# Altium PCB SENSEI_Base-Board.PcbDoc (part 8 of 10)
Units mm, origin at the board's own origin, x right, y up, seen from the top; angles counter-clockwise.
Board outline 51.6 x 28.1 mm, 8 copper layers (Top Sig/Pwr, GND1, Sig1, GND2, Sig2, Pwr, GND3, Bot Sig/Pwr), stack 1.53 mm thick; 209 components, 201 nets, 1031 pads, 2222 vias.
Unrouted connection lines stored in the file: 214.
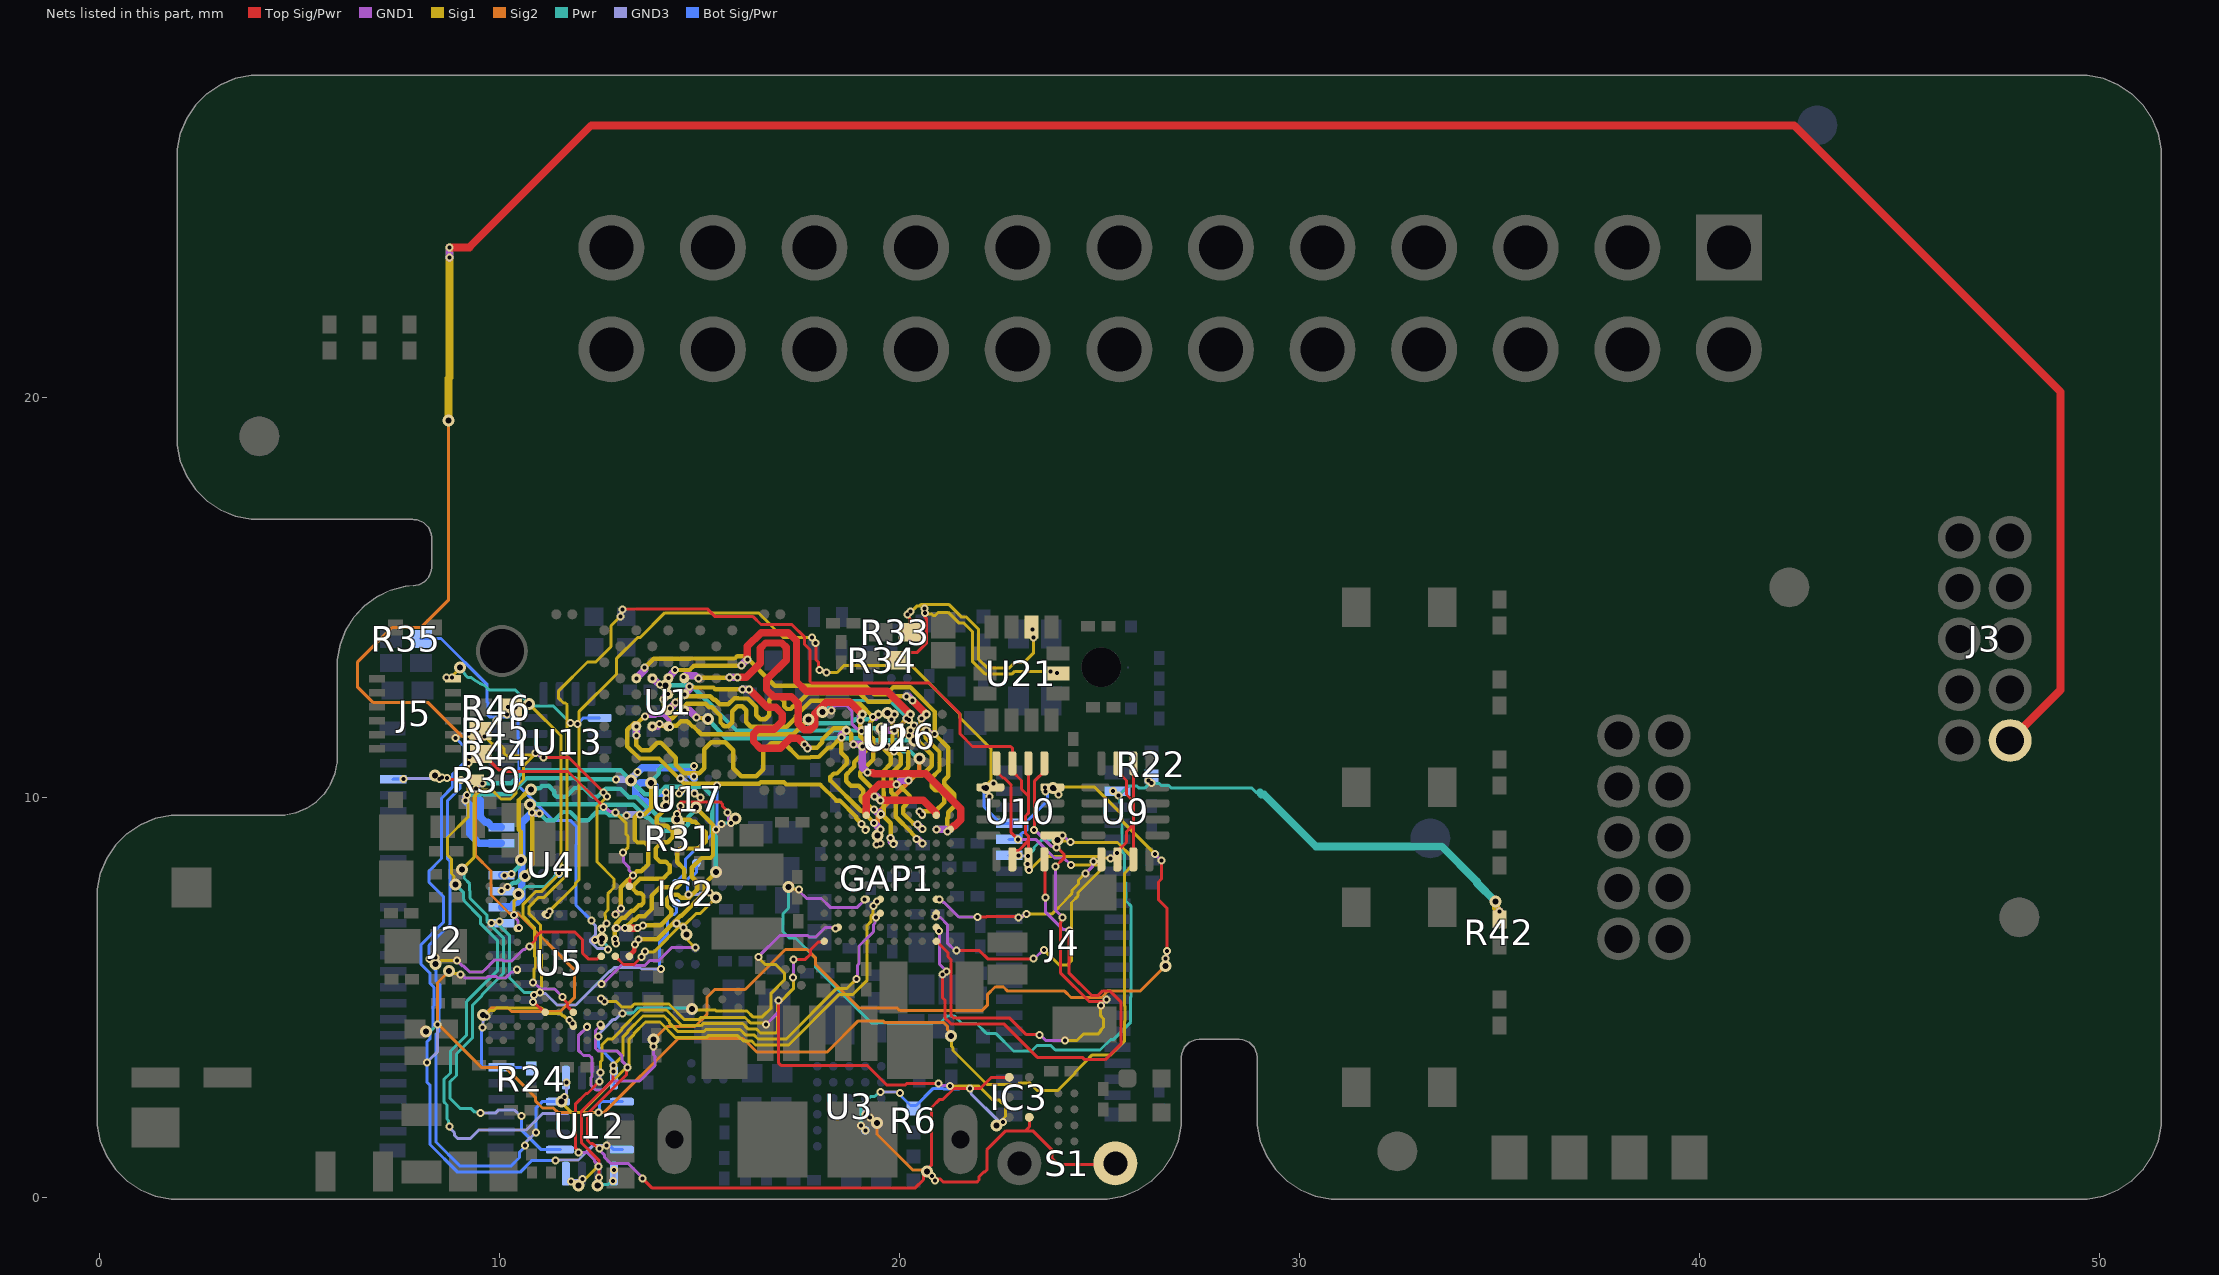
[diagram p13: the nets of this part, all layers, seen from the top]

## Via types
v1: diameter 0.2, hole 0.1, Top Sig/Pwr to GND1, 544 vias
v2: diameter 0.2, hole 0.1, GND3 to Bot Sig/Pwr, 436 vias
v3: diameter 0.2, hole 0.1, GND1 to Sig1, 385 vias
v4: diameter 0.3, hole 0.15, Sig1 to Pwr, 293 vias
v5: diameter 0.3, hole 0.15, Top Sig/Pwr to Bot Sig/Pwr, tented both sides, 284 vias
v6: diameter 0.2, hole 0.1, Pwr to GND3, 280 vias

## Nets (pads, with @x,y where several pads share a name; then routed paths per layer and width w, separated by ;. In a path a pad name is that pad's centre, name@x,y a point inside that pad or via, vN(x,y) a via of type N, cw(c..) or ccw(c..) an arc to the next point about the centre after c; other vN are vias at no path point) (continued)
nRF_P1.00_GAP_GPIO60_GAP: GAP1.J4 U9.5 | length 5
  Top Sig/Pwr w0.075: v1(21.956,7.012) 22.181,7.012 22.183,7.014 22.961,7.014 v1(22.975,7) ; v1(24.85,8.399) 25.024,8.399 U9.5@25.05,8.425
  GND1 w0.075: v1(21.008,7.442) 21.028,7.442 21.105,7.365 21.13,7.365 21.489,7.007 21.951,7.007 v1(21.956,7.012) ; v1(22.975,7) 22.999,7.024 23.088,7.024 23.151,7.087 v3(23.184,7.087) ; v3(24.65,8.099) 24.662,8.099 24.826,8.263 24.826,8.375 v1(24.85,8.399)
  Sig1 w0.075: v3(23.184,7.087) 23.822,7.087 24.153,7.418 24.153,7.433 24.322,7.602 24.322,7.682 24.486,7.846 24.486,7.934 v3(24.65,8.099)
nRF_P1.01_GAP_GPIO61: J4.6 U5.E10 U10.1 | length 22.6
  Top Sig/Pwr w0.075: U5.E10@11.15,7.075 11.172,7.053 v1(11.204,7.053) ; v1(17.903,13.853) 17.919,13.838 17.919,13.438 17.977,13.381 17.977,13.212 v1(18,13.188) ; v1(22.1,10.25) U10.1@22.275,10.25
  GND1 w0.075: v1@11.204,7.103 v1(11.204,7.053) 11.26,7.109 v3(11.26,7.14) ; v3(17.819,13.998) 17.819,13.968 17.903,13.883 v1(17.903,13.853) ; v1(18,13.188) 18.024,13.164 18.109,13.164 18.151,13.123 v3(18.184,13.123) ; v1(22.1,10.25) 22.1,10.216 22.226,10.09 22.226,10.049 v3(22.25,10.025)
  GND3 w0.075: v2(22.125,10.225) 22.159,10.225 22.2,10.266 22.249,10.266 22.324,10.341 v6(22.358,10.341)
  Sig1 w0.075: v3(11.26,7.14) 11.26,7.161 11.91,7.81 11.91,7.859 11.996,7.946 11.996,12.148 12.934,13.085 12.934,13.473 13.452,13.992 13.519,13.992 14.139,14.612 16.48,14.612 17.095,13.998 v3(17.819,13.998) ; v3(18.184,13.123) 18.448,13.123 18.624,13.298 19.442,13.298 19.66,13.298 ; 19.661,13.298 20.298,13.298 21.523,12.073 21.523,11.983 22.298,11.209 22.298,10.425 22.158,10.285 v4@22.158,10.233 ; v4(22.167,10.233) 22.167,10.172 22.226,10.113 22.226,10.049 v3(22.25,10.025)
  Pwr w0.075: v4(22.167,10.233) 22.216,10.233 22.324,10.341 v6(22.358,10.341)
  Bot Sig/Pwr w0.075: v2@22.164,10.185 22.12,10.142 22.12,9.764 22.389,9.495 22.389,9.491 22.53,9.35 J4.6@22.745,9.35
nRF_P1.01_GAP_GPIO61_GAP: GAP1.J3 U10.16 | length 11.3
  Top Sig/Pwr w0.075: v1(21.425,6.171) 22,6.171 22.209,5.962 23.354,5.962 v1(23.359,5.967) ; U10.16@22.436,10.639 22.594,10.481 22.624,10.481 22.797,10.308 22.797,9.117 v1(22.963,8.951)
  GND1 w0.075: v1(20.909,7.017) 20.943,7.017 20.967,6.993 21.029,6.993 21.202,6.82 21.202,6.361 21.392,6.171 v1(21.425,6.171) ; v1(22.963,8.951) 23.411,8.951 23.878,8.484 24.113,8.484 v3(24.29,8.306) ; v1(23.359,5.967) 23.382,5.967 23.592,6.177 v3(23.615,6.177)
  Sig1 w0.075: v3(23.615,6.177) 23.627,6.177 23.991,5.812 24.209,5.812 24.303,5.907 24.303,7.371 24.472,7.54 24.472,7.62 25.042,8.19 25.042,8.252 24.983,8.311 24.295,8.311 v3(24.29,8.306)
nRF_P1.09_GAP_GPIO62: J4.8 U5.H2 U10.12 | length 29.2
  Top Sig/Pwr w0.075: v1(12.196,4.258) 12.196,4.271 U5.H2@12.2,4.275 ; v1(23.65,10.151) 23.75,10.25 U10.12@23.825,10.25 ; v1(26.55,8.421) 26.55,7.956 26.479,7.885 26.479,7.438 26.698,7.218 v1(26.698,6.163)
  GND1 w0.075: v1(12.196,4.258) 11.975,4.037 11.975,3.674 12.105,3.544 12.256,3.544 12.312,3.488 12.312,3.007 12.288,2.983 12.288,2.807 12.413,2.682 12.589,2.682 12.814,2.908 13.511,2.908 13.892,3.289 13.892,3.525 13.857,3.56 v3(13.857,3.775) ; v1(23.65,10.151) 23.866,10.151 23.941,10.075 v3(23.975,10.075) ; v3(26.387,8.578) 26.39,8.578 26.547,8.421 v1(26.55,8.421) ; v3(26.661,5.972) 26.698,6.009 v1(26.698,6.163)
  Sig2 w0.075: v4(13.86,3.945) 14.188,4.273 14.894,4.273 15.187,4.566 15.187,4.993 15.386,5.192 16.148,5.192 17.152,6.196 17.697,6.196 17.901,5.992 17.901,5.824 18.998,4.728 19.949,4.728 20.012,4.665 20.511,4.665 ; 20.512,4.665 21.658,4.665 ; 21.665,4.665 22.065,4.665 22.2,4.8 22.2,5.067 22.39,5.257 22.608,5.257 22.711,5.154 24.135,5.154 24.292,4.998 25.053,4.998 25.218,5.162 26.032,5.162 v4(26.65,5.78)
  GND3 w0.075: v2(23.647,10.243) 23.665,10.225 23.868,10.225 v6(23.886,10.207)
  Sig1 w0.075: v3(13.857,3.775) 13.859,3.777 13.859,3.943 v4(13.86,3.945) ; v3(23.975,10.075) 23.975,10.087 23.847,10.216 v4(23.847,10.228) 23.873,10.254 24.884,10.254 25.572,9.565 25.572,9.403 26.387,8.588 v3(26.387,8.578) ; v4(26.65,5.78) 26.65,5.961 v3(26.661,5.972)
  Pwr w0.075: v4(23.847,10.228) 23.868,10.207 v6(23.886,10.207)
  Bot Sig/Pwr w0.075: J4.8@22.745,8.95 22.96,8.95 23.038,9.028 23.038,9.079 23.081,9.122 23.122,9.122 23.188,9.188 23.188,9.393 23.706,9.911 23.706,10.15 23.662,10.193 v2@23.662,10.254
nRF_P1.09_GAP_GPIO62_GAP: GAP1.J1 U10.13 | length 14.6
  Top Sig/Pwr w0.075: GAP1.J1@20.925,6.4 20.932,6.4 21.217,6.115 21.217,6.016 21.287,5.946 21.287,4.553 21.353,4.487 22.751,4.487 23.164,4.074 23.488,4.074 v1(23.5,4.062) ; v1(23.368,9.188) 23.375,9.195 23.375,10.4 23.64,10.665 U10.13@23.64,10.684 ; U10.13@23.625,10.85 23.625,10.699 U10.13@23.64,10.684 ; U10.13@23.64,10.756 U10.13@23.64,10.684 ; U10.13@23.687,10.637 U10.13@23.64,10.684 ; v1(23.908,8.271) 24.112,8.475 24.112,8.583 23.945,8.75 v1(23.925,8.75) ; v1(24.086,7) 24.086,6.966 24.047,6.927 24.047,6.88 24.027,6.859 24.027,5.614 24.74,4.9 25.091,4.9 25.141,4.95 v1(25.175,4.95)
  GND1 w0.075: v1(23.368,9.188) 23.386,9.188 23.8,8.774 23.901,8.774 v1(23.925,8.75) ; v1(23.5,4.062) 23.517,4.062 23.659,3.92 v3(24.142,3.919) ; v1@23.908,8.252 v1(23.908,8.271) ; v1@23.932,8.257 23.908,8.233 23.908,7.178 v1(24.086,7) ; v3(25.049,4.8) 25.049,4.812 25.175,4.938 v1(25.175,4.95)
  Sig1 w0.075: v3(24.142,3.919) 24.44,3.919 24.609,4.088 24.974,4.088 25.025,4.139 25.025,4.166 25.107,4.248 25.107,4.466 25.025,4.548 25.025,4.61 25.026,4.611 25.026,4.777 v3(25.049,4.8)
nRF_P1.11_GAP_GPIO63: J4.10 U5.C6 U10.9 | length 32.8
  Top Sig/Pwr w0.075: v1(10.446,5.698) 10.446,5.679 U5.C6@10.45,5.675 ; U10.9@23.974,9.08 24.045,9.08 v1(24.075,9.05)
  GND1 w0.075: v3(9.024,5.565) 9.058,5.565 9.137,5.486 9.68,5.486 9.713,5.519 9.925,5.519 9.959,5.486 10.161,5.486 10.305,5.63 10.365,5.63 10.434,5.698 v1(10.446,5.698) ; v1(24.075,9.05) 24.095,9.05 24.264,8.881 v3(24.283,8.881)
  Sig2 w0.075: v4(8.748,5.656) 8.461,5.368 8.461,4.339 9.55,3.25 10.15,3.25 10.9,2.5 10.9,2.415 11.082,2.233 11.351,2.233 11.458,2.125 12.624,2.125 14.471,3.973 16.096,3.973 16.431,3.638 18.203,3.638 18.976,4.411 19.588,4.411 19.634,4.365 20.145,4.365 21.115,4.365 21.21,4.269 21.21,4.181 21.295,4.097 v4(21.295,4.036)
  GND3 w0.075: v2(22.978,8.542) 22.984,8.537 23.218,8.537 v6(23.223,8.532)
  Sig1 w0.075: v4(8.748,5.656) 8.809,5.656 8.876,5.589 9,5.589 v3(9.024,5.565) ; v4(21.295,4.036) 21.307,4.023 21.307,3.773 21.345,3.736 21.345,3.67 22.193,2.822 22.972,2.822 23.014,2.863 23.252,2.863 23.44,2.675 23.966,2.675 24.397,3.105 24.397,3.133 24.671,3.407 24.671,3.408 24.826,3.563 25.288,3.563 25.625,3.9 25.625,4.398 25.638,4.41 25.638,4.784 25.636,4.785 25.636,8.11 25.825,8.298 25.825,8.501 25.454,8.872 24.292,8.872 v3(24.283,8.881) ; v4(23.951,8.936) 23.982,8.905 24.252,8.905 v3@24.28,8.878
  Pwr w0.075: v6(23.223,8.532) 23.223,8.547 23.366,8.69 23.366,8.743 23.56,8.936 v4(23.951,8.936)
  Bot Sig/Pwr w0.075: J4.10@22.745,8.55 22.971,8.55 v2(22.978,8.542)
nRF_P1.11_GAP_GPIO63_GAP: GAP1.J2 U10.8 | length 13.5
  Top Sig/Pwr w0.075: v1(21.075,5.572) 21.075,4.993 21.137,4.931 21.137,4.491 21.291,4.337 22.613,4.337 23.45,3.5 24.576,3.5 24.637,3.439 25.148,3.439 25.538,3.828 25.538,4.888 25.263,5.163 25.087,5.163 24.975,5.05 24.802,5.05 24.239,5.614 24.239,6.664 v1(24.25,6.675) ; U10.8@23.625,8.45 23.637,8.437 23.637,7.504 v1(23.65,7.491)
  Top Sig/Pwr w0.15: GAP1.J2@20.98,6.683 20.98,6.686 GAP1.J2@20.925,6.741 ; v1(20.989,6.66) 20.989,6.673 20.976,6.686 20.976,6.689 GAP1.J2@20.925,6.741 ; GAP1.J2@20.925,6.741 GAP1.J2@20.925,6.75 GAP1.J2@20.925,6.741
  GND1 w0.075: v1(20.989,6.66) 21.005,6.645 21.005,5.829 21.18,5.654 v3(21.18,5.64) ; v1(21.075,5.572) 21.075,5.577 v3@21.152,5.654 ; v1(23.65,7.491) 23.65,7.136 24.087,6.699 24.226,6.699 v1(24.25,6.675)
nRF_QSPI_CLK: J2.20 U5.L7 U17.B3 | length 13.5
  Top Sig/Pwr w0.111: U5.L7@13.25,6.025 13.25,6.046 13.371,6.167 13.371,6.308 v1@13.378,6.316
  GND1 w0.111: v1(13.388,6.319) 13.388,6.341 13.475,6.428 v3(13.475,6.45)
  GND3 w0.111: v2(9.414,10.218) 9.428,10.218 9.561,10.35 v6(9.575,10.35) ; v2(14.498,10.094) 14.498,10.106 v6@14.571,10.179 ; v2@14.519,10.127 v6@14.571,10.179 ; v6@14.571,10.179 v6(14.571,10.191) v6@14.571,10.179
  Sig1 w0.111: v3(13.475,6.45) 13.945,6.45 14.533,7.037 14.554,7.037 15.139,7.622 15.139,7.846 15.419,8.126 v4(15.419,8.132)
  Pwr w0.111: v6(9.575,10.35) 10.298,10.35 10.625,10.677 13.032,10.677 v4(13.295,10.414) 13.636,10.073 13.957,10.073 14.153,10.268 14.598,10.268 v6@14.605,10.262 ; v6(14.571,10.191) 14.573,10.193 v6@14.573,10.268 ; v6@14.611,10.268 15.088,10.268 15.32,10.036 15.32,9.123 15.413,9.029 15.413,8.138 v4(15.419,8.132)
  Bot Sig/Pwr w0.185: v2(9.414,10.218) 9.417,10.215 9.417,10.032 9.521,9.928 9.521,9.507 9.656,9.373 9.712,9.373 9.817,9.268 10.037,9.268 J2.20@10.055,9.25 ; v2(14.498,10.094) 14.525,10.121 U17.B3@14.525,10.125
nRF_QSPI_CS: IC2.A1 U5.K7 | length 5
  Top Sig/Pwr w0.075: U5.K7@12.9,6.025 13.108,5.817 13.323,5.817 13.368,5.817 13.556,6.005 v1(13.556,6.011)
  GND1 w0.075: v1(13.556,6.011) 13.556,6.034 13.638,6.116 v3(13.638,6.139)
  GND3 w0.075: v2(14.725,7.575) 15.001,7.575 15.039,7.613 15.239,7.613 v6(15.251,7.625)
  Sig1 w0.075: v3(13.638,6.139) 13.649,6.127 13.86,6.127 14.569,6.836 14.662,6.836 14.917,7.091 15.02,7.091 v4(15.419,7.49)
  Pwr w0.075: v6(15.251,7.625) 15.267,7.625 15.403,7.49 v4(15.419,7.49)
  Bot Sig/Pwr w0.075: v2(14.725,7.575) 14.701,7.599 14.701,7.755 14.7,7.757 14.7,7.943 14.832,8.076 14.881,8.076 14.925,8.119 IC2.A1@14.925,8.35
nRF_QSPI_CS_CONN: IC2.C2 J2.14 | length 8.1
  GND3 w0.075: v2(9.801,6.857) 9.818,6.873 9.983,6.873 v6(10,6.89) ; v6(11.017,5.12) 11.041,5.096 11.156,5.096 11.446,4.806 11.91,4.806 12.743,5.639 12.764,5.639 12.866,5.741 13.52,5.741 13.554,5.707 v2(14.045,5.707)
  Pwr w0.075: v6(10,6.89) 10.024,6.866 10.024,6.778 10.26,6.541 10.26,5.481 10.621,5.12 v6(11.017,5.12)
  Bot Sig/Pwr w0.075: v2(14.045,5.707) 14,5.751 14,6.369 14.2,6.568 14.2,6.943 14.332,7.076 14.381,7.076 14.425,7.119 IC2.C2@14.425,7.35
nRF_QSPI_CS_RAM: IC2.B2 R31.1 U17.A3 | length 7
  Top Sig/Pwr w0.075: R31.1@14.5,9.234 14.5,9.844 14.544,9.887 15.523,9.887 15.576,9.834 15.576,9.783 15.7,9.659 v1(15.7,9.625)
  GND1 w0.075: v1(15.7,9.625) 15.724,9.601 15.724,9.45 15.786,9.387 v3(15.786,9.353)
  GND3 w0.075: v2(14.528,10.465) 14.552,10.441 14.65,10.441 14.785,10.306 15.034,10.306 15.044,10.297 v2(15.445,10.297) ; v2(15.421,9.194) 15.421,9.198 15.55,9.328 v6(15.55,9.331)
  Sig1 w0.075: v3(15.786,9.353) 15.79,9.353 15.904,9.467 v4(15.907,9.467)
  Pwr w0.075: v6(15.55,9.331) 15.574,9.355 15.735,9.355 15.847,9.467 v4(15.907,9.467)
  Bot Sig/Pwr w0.075: IC2.B2@14.425,7.85 14.425,7.881 14.651,8.107 14.651,8.445 14.903,8.698 14.939,8.698 v2@15.445,9.204 ; U17.A3@14.525,10.475 14.528,10.472 v2(14.528,10.465) ; v2(15.421,9.194) 15.431,9.204 v2@15.445,9.204 ; v2(15.445,10.297) v2@15.445,9.204
nRF_QSPI_CS_SEL: IC2.D2 U5.J5 | length 3.6
  Top Sig/Pwr w0.075: U5.J5@12.55,5.325 v1(12.555,5.33)
  GND1 w0.075: v1(12.555,5.33) 12.583,5.33 13.071,5.817 13.358,5.817 13.377,5.799 13.644,5.799 13.764,5.919 13.987,5.919 14.308,6.24 v3(14.901,6.24)
  GND3 w0.075: v2(14.435,6.85) 14.469,6.85 14.548,6.771 14.587,6.771 v6(14.611,6.747)
  Sig1 w0.075: v4(14.677,6.573) 14.72,6.53 14.72,6.42 v3(14.901,6.24)
  Pwr w0.075: v6(14.611,6.747) 14.635,6.723 14.635,6.616 v4(14.677,6.573)
  Bot Sig/Pwr w0.075: IC2.D2@14.425,6.85 v2(14.435,6.85)
nRF_QSPI_IO0: J2.19 U5.K10 U17.A2 | length 13.9
  GND1 w0.111: v1(12.9,7.074) 12.9,7.079 13.04,7.219 v3(13.04,7.223)
  GND3 w0.111: v6(14.864,10.785) 14.868,10.781 14.868,10.524 v2(14.873,10.519)
  GND3 w0.185: v2(9.152,9.919) 9.155,9.922 9.155,10.017 9.191,10.053 v6(9.191,10.057) ; v6(12.914,10.446) 12.917,10.449 13.276,10.449 13.456,10.629 v2(13.46,10.629)
  Sig1 w0.111: v3(13.04,7.223) 13.04,7.748 13.441,8.149 13.549,8.149 13.721,8.322 13.721,8.786 13.638,8.87 13.455,8.87 13.39,8.934 13.39,9.093 13.384,9.1 13.384,9.505 13.455,9.576 13.63,9.576 13.798,9.744 v4(13.798,10.353)
  Pwr w0.111: v6(9.191,10.057) 9.492,10.057 9.512,10.077 10.288,10.077 10.682,10.471 11.892,10.471 11.917,10.446 v6(12.914,10.446) ; v4(13.798,10.353) 13.798,10.404 13.991,10.597 13.991,10.695 14.082,10.785 v6(14.864,10.785)
  Bot Sig/Pwr w0.185: v2(9.152,9.919) 9.152,9.915 9.262,9.805 9.262,9.081 9.417,8.925 9.493,8.85 J2.19@10.055,8.85 ; v2(13.46,10.629) 13.464,10.629 13.572,10.737 14.634,10.737 14.787,10.584 14.787,10.564 U17.A2@14.875,10.475 ; U17.A2@14.853,10.499 v2(14.873,10.519)
nRF_QSPI_IO1: J2.17 U5.K9 U17.C3 | length 12.5
  Top Sig/Pwr w0.185: U5.K9@12.9,6.725 12.906,6.731 v1(12.93,6.731)
  GND1 w0.111: v1@12.93,6.731 v3@13.138,6.731
  GND3 w0.111: v2(10.127,8.043) 10.144,8.06 10.252,8.06 10.28,8.088 v6(10.304,8.088) ; v6(14.443,9.577) 14.443,9.601 14.51,9.668 14.51,9.762 v2(14.527,9.78)
  Sig1 w0.111: v4(10.539,8.436) 10.539,9.142 10.49,9.191 10.49,9.933 10.687,10.129 10.736,10.129 v4(10.798,10.191) ; v3(13.138,6.73) 13.342,6.935 13.388,6.935 13.485,7.031 13.633,7.031 13.81,7.208 13.81,7.543 14.02,7.753 14.437,7.753 14.629,7.945 14.629,8.194 14.449,8.374 14.449,8.646 14.497,8.694 cw(c14.575,8.616) 14.578,8.727 14.844,8.72 ccw(c14.85,8.95) 14.868,8.72 14.955,8.727 ccw(c14.947,8.838) 15.025,8.759 15.157,8.891 15.157,9.123 14.895,9.386 14.817,9.386 14.763,9.44 v4(14.445,9.44)
  Pwr w0.111: v6(10.304,8.088) 10.503,8.287 10.503,8.4 v4(10.539,8.436) ; v4(10.798,10.191) 10.835,10.227 11.017,10.227 11.075,10.285 11.236,10.285 11.369,10.153 11.369,10.076 11.433,10.011 11.665,10.011 11.895,10.241 12.108,10.241 12.337,10.011 12.453,10.011 12.658,10.216 13.029,10.216 13.24,10.004 13.428,10.004 13.693,9.74 13.751,9.74 14.051,9.44 v4(14.445,9.44) ; v4(14.445,9.44) v6@14.444,9.577
  Bot Sig/Pwr w0.185: J2.17@10.055,8.05 10.12,8.05 v2(10.127,8.043)
nRF_QSPI_IO2: J2.16 U5.L9 U17.B2 | length 13.1
  Top Sig/Pwr w0.185: U5.L9@13.25,6.725 13.251,6.726 v1(13.456,6.727) v1(13.456,6.727)
  GND1 w0.111: v1(13.456,6.727) 13.48,6.727 13.536,6.784 13.581,6.784 v3(13.598,6.801)
  GND3 w0.111: v2(10.054,7.655) 10.078,7.655 10.159,7.736 10.187,7.736 v6(10.204,7.753) ; v2(14.881,10.094) 14.899,10.077 14.929,10.077 15.006,10 v6(15.03,10)
  Sig1 w0.111: v4(10.643,8.031) 10.643,8.082 10.767,8.206 10.767,8.267 10.819,8.32 10.819,9.717 10.771,9.766 v4(10.771,9.817) ; v3@13.604,6.801 14.034,6.801 14.294,7.061 14.294,7.185 14.193,7.287 14.193,7.463 14.296,7.567 14.467,7.567 14.544,7.49 14.744,7.49 14.953,7.699 14.953,7.877 14.815,8.016 14.815,8.237 15.06,8.483 15.28,8.483 15.343,8.545 15.343,9.314 v4(14.913,9.744)
  Pwr w0.111: v6(10.204,7.753) 10.229,7.753 10.334,7.858 10.359,7.858 10.367,7.866 10.428,7.866 10.592,8.031 v4(10.643,8.031) ; v4@10.758,9.825 12.555,9.825 12.561,9.819 13.351,9.819 13.681,9.489 13.739,9.489 14.069,9.159 14.552,9.159 14.573,9.18 14.582,9.18 14.725,9.323 14.725,9.505 14.913,9.693 v4(14.913,9.744) 14.913,9.795 15.013,9.895 15.013,9.983 v6(15.03,10)
  Bot Sig/Pwr w0.185: v2(10.054,7.655) 10.054,7.651 J2.16@10.055,7.65
nRF_QSPI_IO3: J2.15 U5.K8 U17.B4 | length 13.9
  GND1 w0.111: v1@12.901,6.377 12.903,6.379 v1@12.903,6.446 ; v1(12.915,6.349) 12.903,6.361 v1@12.903,6.446 ; v1@12.903,6.446 v3(12.892,6.458) v1@12.903,6.446
  GND3 w0.111: v2(14.172,10.123) 14.177,10.118 14.177,9.976 v6(14.182,9.971)
  GND3 w0.185: v2(10.815,9.618) 10.819,9.618 10.839,9.598 11.005,9.598 v6(11.008,9.595) ; v6(13.181,9.545) 13.185,9.545 13.211,9.57 13.509,9.57 v2(13.512,9.573)
  Sig1 w0.111: v3(12.892,6.458) 12.892,6.728 12.908,6.745 12.908,6.826 13.075,6.993 13.135,6.993 13.307,7.165 13.356,7.165 13.491,7.3 13.544,7.3 13.605,7.361 13.605,7.538 13.54,7.602 13.447,7.602 13.355,7.694 13.355,7.8 13.518,7.964 14.091,7.964 14.257,8.13 14.257,8.296 14.165,8.388 14.019,8.388 13.907,8.5 13.907,8.719 14.068,8.88 14.21,8.88 14.332,9.002 14.332,9.143 14.187,9.289 13.999,9.289 13.934,9.354 13.934,9.496 14.166,9.728 v4(14.166,9.779)
  Pwr w0.111: v6(11.008,9.595) 11.181,9.422 11.373,9.422 11.584,9.633 11.777,9.633 11.988,9.422 12.22,9.422 12.425,9.627 12.673,9.627 12.755,9.545 v6(13.181,9.545) ; v4@14.13,9.816 v4(14.166,9.779) 14.174,9.787 14.174,9.964 v6(14.182,9.971)
  Bot Sig/Pwr w0.185: J2.15@10.055,7.25 10.073,7.268 10.293,7.268 10.398,7.373 10.454,7.373 10.563,7.482 10.563,9.363 10.815,9.614 v2(10.815,9.618) ; v2(13.512,9.573) 13.515,9.576 13.635,9.576 13.72,9.661 13.72,9.861 13.7,9.88 ; 13.662,9.897 13.655,9.904 13.586,9.904 13.412,10.077 13.412,10.254 13.52,10.362 13.818,10.362 13.903,10.277 13.903,10.184 13.99,10.097 14.146,10.097 v2(14.172,10.123)
nRF_RAM_pwr_sel: U4.B2 U5.C9 | length 2.6
  Top Sig/Pwr w0.075: U5.C9@10.45,6.725 10.451,6.726 v1(10.493,6.726)
  GND1 w0.075: v3(10.362,7.053) 10.362,7.019 10.469,6.912 10.469,6.75 v1(10.493,6.726)
  GND3 w0.075: v2(11.487,8.103) 11.487,8.115 11.597,8.225 v6(11.597,8.236)
  Sig1 w0.075: v3(10.362,7.053) 10.362,7.404 10.483,7.525 v4(10.483,7.586)
  Pwr w0.075: v4(10.483,7.586) 10.49,7.586 10.672,7.769 11.13,7.769 v6(11.597,8.236)
OSPI_0: GAP1.J10 U1.H7 U2.D5 | length 11.8
  Top Sig/Pwr w0.185: v1(19.525,9.925) 20.597,9.925 20.925,9.597 GAP1.J10@20.925,9.55
  GND1 w0.185: v3(14.106,12.445) 14.109,12.448 14.109,12.468 14.219,12.578 v1(14.219,12.582) ; v3(19.342,12.008) 19.342,12.001 19.397,12.001 19.471,12.075 v1(19.475,12.075) ; v3(19.381,10.025) 19.384,10.022 19.424,10.022 19.521,9.925 v1(19.525,9.925)
  Sig1 w0.111: v3(14.106,12.445) 14.111,12.44 14.111,12.064 14.201,11.975 14.326,11.975 14.69,12.339 15.161,12.339 15.25,12.25 15.321,12.25 15.53,12.041 15.53,11.87 15.625,11.775 15.725,11.775 15.825,11.875 15.825,12.15 15.95,12.275 16.075,12.275 16.175,12.175 16.175,11.875 16.289,11.761 17.186,11.761 17.412,11.987 17.412,12.033 17.795,12.417 18.77,12.417 18.848,12.339 19.011,12.339 v3(19.342,12.008) ; v3@19.319,11.987 19.336,11.97 19.336,11.945 19.27,11.879 19.27,11.544 19.345,11.468 19.345,10.945 19.025,10.625 19.025,10.525 19.375,10.175 19.375,10.03 v3(19.381,10.025)
OSPI_1: GAP1.H8 U1.G5 U2.D4 | length 10.4
  GND1 w0.185: v1(13.825,11.775) 13.828,11.778 13.948,11.778 14.004,11.835 v3(14.008,11.835) ; v3(19.803,11.94) 19.806,11.943 19.806,12.002 19.875,12.071 v1(19.875,12.075) ; v3(20.433,8.957) 20.436,8.954 20.467,8.954 20.571,8.85 v1(20.575,8.85)
  Sig1 w0.111: v3(14.008,11.835) 14.033,11.835 14.078,11.789 14.433,11.789 14.543,11.9 14.699,11.9 14.829,11.77 14.857,11.77 15.052,11.575 17.35,11.575 v4(17.725,11.95) ; v4(19.7,12.104) 19.7,12.067 19.803,11.965 v3(19.803,11.94) 19.82,11.923 19.82,11.851 19.83,11.841 19.83,11.257 20.039,11.048 20.039,10.827 19.8,10.588 19.8,10.125 19.925,10 19.925,9.838 19.914,9.827 19.914,9.512 20.305,9.12 20.305,9.109 20.433,8.981 v3(20.433,8.957)
  Pwr w0.111: v4(17.725,11.95) 17.761,11.914 17.901,11.914 17.959,11.856 18.802,11.856 18.896,11.95 19.333,11.95 19.455,12.072 19.669,12.072 v4(19.7,12.104)
OSPI_2: GAP1.H9 U1.H8 U2.D3 | length 11.7
  Top Sig/Pwr w0.185: v1(16.2,13.45) 16.203,13.453 16.203,13.772 16.548,14.117 17.227,14.117 17.429,13.915 17.429,12.896 17.675,12.65 19.7,12.65 v1(20.275,12.075)
  GND1 w0.185: v1(14.233,12.984) v3(14.391,13.182) ; v3(16.05,13.3) v1(16.2,13.45) ; v3(20.175,11.975) v1(20.275,12.075) ; v3(20.45,9.325) 20.452,9.325 20.575,9.203 v1(20.576,9.203)
  Sig1 w0.111: v3(14.391,13.182) 14.757,13.182 14.859,13.284 16.034,13.284 v3(16.05,13.3) ; v3(20.175,11.975) 20.175,11.951 20.016,11.792 20.016,11.334 20.225,11.125 20.225,10.75 19.995,10.52 19.995,10.305 20.268,10.031 20.268,9.918 20.1,9.75 20.1,9.595 20.353,9.342 20.433,9.342 v3(20.45,9.325)
OSPI_3: GAP1.H10 U1.H6 U2.D2 | length 11.8
  Top Sig/Pwr w0.185: U1.H6@14.225,12.175 14.225,12.179 v1(14.271,12.225) ; v1(20.325,12.425) v1(20.675,12.075)
  GND1 w0.185: v1(14.271,12.225) 14.271,12.229 14.397,12.355 14.397,12.372 v3(14.4,12.375) ; v3(20.175,12.525) 20.178,12.522 20.224,12.522 20.321,12.425 v1(20.325,12.425) ; v3@20.506,9.643 20.506,9.641 20.572,9.574 v1(20.572,9.572) ; v3(20.55,11.975) 20.553,11.978 20.574,11.978 20.671,12.075 v1(20.675,12.075)
  Sig1 w0.111: v3(14.4,12.375) 14.424,12.375 14.574,12.525 15.275,12.525 15.364,12.436 15.398,12.436 15.508,12.325 15.725,12.325 15.879,12.479 15.97,12.479 15.98,12.47 16.21,12.47 16.425,12.255 16.425,12.05 16.525,11.95 16.65,11.95 16.75,12.05 16.75,12.425 16.85,12.525 17,12.525 17.125,12.4 17.125,12.271 17.19,12.207 17.282,12.207 17.35,12.275 17.387,12.275 17.715,12.603 19.01,12.603 19.229,12.384 19.744,12.384 19.886,12.525 v3(20.175,12.525) ; v3@20.506,9.643 20.511,9.648 20.902,9.648 21.124,9.87 21.124,10.054 21.003,10.175 20.895,10.175 20.81,10.26 20.81,10.485 21.005,10.68 21.005,11.133 20.655,11.482 20.655,11.541 20.533,11.663 20.533,11.958 v3(20.55,11.975)
  other v3: 20.505,9.65
OSPI_4: GAP1.E10 U1.J8 U2.D6 | length 11.6
  Top Sig/Pwr w0.185: v1(15.95,13) 15.953,13.003 16.178,13.003 16.525,13.35 16.525,13.727 16.656,13.857 17.061,13.857 17.17,13.749 17.17,13.428 16.679,12.937 16.679,12.691 16.86,12.51 17.305,12.51 17.475,12.34 17.475,11.842 17.625,11.692 17.778,11.692 17.886,11.801 17.886,12.085 18.176,12.375 18.775,12.375 v1(19.075,12.075)
  GND1 w0.185: v1(14.604,13.008) 14.608,13.008 14.643,13.042 14.904,13.042 14.971,12.975 v3(14.975,12.975) ; v3(15.75,13) v1(15.95,13) ; v3(19.026,11.926) 19.028,11.928 19.028,12.024 19.075,12.071 v1(19.075,12.075) ; v3(19.369,9.694) 19.373,9.694 19.443,9.625 19.495,9.625 19.542,9.578 v1(19.546,9.578)
  Sig1 w0.111: v3(14.975,12.975) 14.988,12.988 15.738,12.988 v3(15.75,13) ; v3(19.026,11.926) 19.025,11.526 19.16,11.391 19.16,11.166 18.875,10.881 18.875,10.77 18.791,10.686 18.791,10.682 18.675,10.566 18.675,10.401 18.787,10.29 18.985,10.29 19.1,10.175 19.1,10.083 19.033,10.016 19.033,9.925 19.111,9.846 19.193,9.846 19.345,9.694 v3(19.369,9.694)
OSPI_5: GAP1.E9 U1.F5 U2.C7 | length 11.7
  GND1 w0.185: v1(13.425,11.775) 13.427,11.773 13.427,11.552 v3(13.429,11.55) ; v3(18.55,11.5) 18.553,11.503 18.553,11.549 18.675,11.671 v1(18.675,11.675) ; v3(19.368,9.363) 19.368,9.36 19.525,9.203 v1(19.525,9.2)
  Sig1 w0.111: v3(13.429,11.55) 13.425,11.546 13.425,11.306 13.556,11.175 13.76,11.175 13.948,11.364 14.04,11.364 14.414,10.99 14.414,10.811 14.625,10.6 15,10.6 15.125,10.725 15.125,11.2 15.3,11.375 15.65,11.375 15.85,11.175 15.85,10.725 16.05,10.525 16.425,10.525 16.6,10.7 16.6,11.15 16.8,11.35 17.125,11.35 17.48,10.995 17.772,10.995 17.784,11.007 17.988,11.007 18.227,11.245 18.295,11.245 v3(18.55,11.5) ; v3@18.55,11.494 18.55,11.114 18.689,10.975 18.689,10.847 18.605,10.763 18.605,10.759 18.441,10.595 18.364,10.595 18.278,10.509 18.278,10.417 19.034,9.661 19.071,9.661 v3(19.368,9.363)
OSPI_6: GAP1.F8 U1.G8 U2.C4 | length 9.8
  GND1 w0.185: v1(13.825,12.975) v3(14.017,12.814) ; v3(19.586,11.573) 19.586,11.575 19.583,11.578 19.676,11.672 19.872,11.672 v1(19.875,11.675) ; v3(19.778,8.985) 19.778,8.981 19.8,8.959 19.8,8.891 19.856,8.835 v1(19.856,8.831)
  Sig1 w0.111: v3(14.017,12.814) v4(14.15,12.8) ; v4(19.55,11.725) 19.564,11.711 19.564,11.593 19.579,11.578 19.579,11.554 19.531,11.507 19.531,11.349 19.623,11.257 19.623,11.202 19.788,11.036 19.788,10.839 19.605,10.656 19.605,10.126 19.611,10.12 19.611,9.527 19.785,9.353 19.785,8.993 v3(19.778,8.985) ; v3@19.579,11.573 v3(19.586,11.573)
  Pwr w0.111: v4(14.15,12.8) 14.8,12.8 15.93,11.67 18.985,11.67 19.04,11.725 v4(19.55,11.725)
OSPI_7: GAP1.D10 U1.J6 U2.C3 | length 9.6
  Top Sig/Pwr w0.185: GAP1.D10@19.175,9.55 19.175,10 19.5,10.325 v1(19.932,10.325)
  GND1 w0.185: v1(14.625,12.175) 14.628,12.172 14.749,12.172 14.921,12 v3(14.925,12) ; v1(19.932,10.325) 19.937,10.325 20.032,10.421 20.222,10.421 v3(20.225,10.424) ; v3@20.248,11.55 v3(20.246,11.55) 20.246,11.554 20.272,11.58 20.272,11.672 v1(20.275,11.675)
  Sig1 w0.111: v3(14.925,12) v4(15.223,11.951) ; v3(20.225,10.424) 20.249,10.424 20.376,10.552 20.577,10.552 20.811,10.786 20.811,11.064 20.513,11.362 20.438,11.362 v4(20.375,11.425) 20.25,11.55 v3(20.246,11.55)
  Pwr w0.111: v4(15.223,11.951) 15.47,11.68 ccw(c15.552,11.755) 15.473,11.677 15.474,11.676 15.675,11.475 19.3,11.475 19.35,11.425 v4(20.375,11.425)
OSPI_CLK: GAP1.K9 U1.J7 U2.B6 | length 11.7
  Top Sig/Pwr w0.185: v1(16.248,12.698) 16.697,12.25 16.908,12.25 17.075,12.083 17.075,11.9 16.875,11.7 16.463,11.7 16.355,11.592 16.355,11.395 16.525,11.225 17.025,11.225 17.275,11.475 17.471,11.475 17.621,11.325 v1(17.625,11.325) ; v1(19.208,10.617) 19.211,10.614 19.336,10.614 19.358,10.593 20.657,10.593 21.535,9.715 21.535,9.442 21.383,9.29 21.365,9.29 GAP1.K9@21.275,9.2
  GND1 w0.185: v1(14.625,12.575) 14.625,12.579 14.747,12.701 14.747,12.772 v3(14.75,12.775) ; v3@16.076,12.699 v1(16.248,12.698) ; v1(17.625,11.325) 17.625,11.321 17.707,11.239 17.707,11.228 v3(17.71,11.225) ; v3(18.85,11.325) 18.853,11.322 19.024,11.322 19.071,11.275 v1(19.075,11.275) 19.075,10.754 19.208,10.621 v1(19.208,10.617)
  Sig1 w0.111: v3(14.75,12.775) 14.767,12.758 14.866,12.758 14.88,12.745 15.355,12.745 15.4,12.7 v3(16.075,12.7) ; v3(17.71,11.225) 17.727,11.242 17.942,11.242 18.075,11.375 18.075,11.445 18.36,11.73 18.645,11.73 18.8,11.576 18.8,11.399 18.85,11.349 v3(18.85,11.325)
OSPI_CS0: GAP1.D9 U1.H5 | length 8.8
  GND1 w0.107: v3(13.641,12.014) 13.659,12.032 13.882,12.032 13.886,12.035 13.899,12.035 13.927,12.063 14.103,12.063 14.255,11.911 14.255,11.777 v1(14.273,11.76) ; v3(19.05,9.331) 19.05,9.311 19.155,9.206 v1(19.155,9.186)
  Sig1 w0.107: v3(13.641,12.014) 13.616,12.014 13.458,11.856 13.365,11.856 13.2,11.691 13.2,11.271 13.503,10.968 13.992,10.968 14.618,10.341 16.501,10.341 16.534,10.374 17.12,10.374 17.173,10.321 18.022,10.321 18.427,9.916 18.516,9.916 18.922,9.51 18.922,9.478 19.05,9.35 v3(19.05,9.331)
OSPI_CS1: GAP1.E8 U16.1 | length 3.6
  Top Sig/Pwr w0.107: GAP1.E8@19.525,8.85 19.528,8.85 v1(19.532,8.845)
  GND1 w0.107: v3(19.435,8.824) 19.446,8.835 19.522,8.835 v1(19.532,8.845)
  Sig2 w0.107: v4@19.462,9.053 19.462,9.612 20.5,10.65 20.5,10.968 v4(20.505,10.973)
  GND3 w0.107: v2(19.682,11.265) 19.708,11.265 19.81,11.163 19.855,11.163 v6(19.872,11.145)
  Sig1 w0.107: v3(19.435,8.824) 19.447,8.836 19.447,9.039 v4(19.46,9.051)
  Pwr w0.107: v6(19.872,11.145) 20.281,11.145 20.453,10.973 v4(20.505,10.973)
OSPI_CS1_RAM: U2.C6 U16.4 | length 4.2
  Top Sig/Pwr w0.075: v1(19.058,11.652) 19.058,11.658 U2.C6@19.075,11.675
  GND1 w0.075: v3(18.3,12.175) 18.3,12.188 18.406,12.294 18.682,12.294 18.813,12.163 18.813,11.837 18.938,11.713 18.964,11.713 19.025,11.652 v1(19.058,11.652)
  GND3 w0.075: v6(20.246,11.929) 20.246,11.926 20.369,11.804 v2(20.369,11.801)
  Sig1 w0.075: v4(18.075,12.136) 18.094,12.156 18.281,12.156 v3(18.3,12.175)
  Pwr w0.075: v4(18.075,12.136) 18.302,12.363 18.51,12.363 18.546,12.399 18.643,12.399 18.667,12.423 19.752,12.423 20.225,11.95 v6@20.225,11.925
  Bot Sig/Pwr w0.075: v2(20.369,11.801) U16.4@20.382,11.785 U16.4@20.382,11.785
OSPI_DS: GAP1.J9 U1.F8 U2.C2 | length 12.3
  GND1 w0.185: v1(13.425,12.975) 13.425,12.979 13.633,13.188 13.633,13.236 v3(13.636,13.239) ; v1(20.675,11.675) 20.679,11.675 20.776,11.578 20.875,11.578 20.878,11.581 v3(20.882,11.581) v3@20.879,11.584 ; v1(20.925,9.2) 20.928,9.197 21.149,9.197 21.196,9.15 v3(21.2,9.15)
  Sig1 w0.111: v3(13.636,13.239) 13.639,13.239 13.862,13.462 14.774,13.462 14.782,13.47 15.891,13.47 15.952,13.53 16.145,13.53 16.888,12.788 19.152,12.788 19.371,12.57 19.668,12.57 19.853,12.755 20.27,12.755 20.882,12.144 v3(20.882,11.581) 21.225,11.238 21.225,10.525 21.125,10.425 21.125,10.325 21.375,10.075 21.375,9.775 21.225,9.625 21.225,9.5 21.2,9.475 v3(21.2,9.15)
PMIC_E\N\: IC3.C2 S1.2 U3.B3 | length 9.1
  Top Sig/Pwr w0.075: v1(20.817,0.531) 20.85,0.531 20.929,0.451 21.028,0.451 21.092,0.388 21.95,0.388 21.994,0.432 21.994,0.514 22.118,0.638 22.144,0.638 22.187,0.682 22.187,1.187 22.663,1.663 23.153,1.663 ; IC3.C2@23.257,2 23.257,1.766 23.153,1.663 ; S1.2@25.4,0.85 25.374,0.824 23.966,0.824 23.813,0.978 23.813,1.187 23.337,1.663 23.153,1.663
  GND1 w0.075: v1(20.817,0.531) 20.817,0.511 20.889,0.438 v3(20.889,0.418)
  Sig2 w0.075: v4(19.447,1.856) 19.447,1.568 20.328,0.688 20.658,0.688 v4(20.696,0.65)
  GND3 w0.075: v2(19.15,2.075) 19.17,2.075 19.246,1.999 v6(19.266,1.999)
  Sig1 w0.075: v4(20.696,0.65) 20.696,0.631 20.889,0.437 v3(20.889,0.418)
  Pwr w0.075: v6(19.266,1.999) 19.285,1.999 19.428,1.856 v4(19.447,1.856)
PMIC_I\R\Q\: R6.1 U3.B2 U5.J4 | length 18.8
  Top Sig/Pwr w0.075: v1(12.544,4.973) 12.548,4.973 U5.J4@12.55,4.975 ; v1(16.975,4.924) 16.975,3.365 17.05,3.289 19.207,3.289 19.683,2.813 20.15,2.813 20.18,2.844 v1(20.975,2.844)
  GND1 w0.075: v1(12.544,4.973) 12.556,4.973 v3(12.63,4.899) ; v3(16.674,4.323) 16.975,4.624 v1(16.975,4.924) ; v1(20.975,2.844) 21.009,2.844 21.057,2.796 21.251,2.796 v3(21.27,2.776)
  GND3 w0.075: v6(19.037,1.799) 19.037,1.794 19.15,1.681 v2(19.15,1.675) ; v6(19.528,2.632) 19.776,2.632 19.778,2.63 20.001,2.63 v2(20.018,2.613) ; v2(21.77,2.714) 21.794,2.69 21.794,2.591 22.485,1.9 22.572,1.9 v6(22.596,1.876)
  Sig1 w0.075: v3(12.63,4.899) 12.918,4.899 13.055,4.762 13.309,4.762 13.377,4.831 14.244,4.831 14.633,4.442 14.985,4.442 15.036,4.492 16.145,4.492 16.276,4.361 16.567,4.361 16.582,4.347 16.65,4.347 v3(16.674,4.323) ; v3(21.27,2.776) 21.992,2.776 22.342,2.426 22.501,2.426 22.654,2.273 22.654,2.02 v4(22.425,1.79)
  Pwr w0.075: v6(19.037,1.799) 19.037,2.272 19.286,2.521 19.383,2.521 19.494,2.632 v6(19.528,2.632) ; v4(22.425,1.79) 22.476,1.79 22.562,1.876 v6(22.596,1.876)
  Bot Sig/Pwr w0.075: v2(20.018,2.613) 20.042,2.589 20.042,2.533 20.279,2.296 20.421,2.296 20.839,2.714 21.098,2.714 21.102,2.711 21.498,2.711 21.502,2.714 v2(21.77,2.714)
QVAR1: R34.2 U21.6 | length 6.4
  Top Sig/Pwr w0.075: R34.2@19.941,13.425 20.139,13.624 20.45,13.624 20.675,13.849 20.675,14.475 20.637,14.512 20.637,14.713 v1(20.625,14.725)
  GND1 w0.075: v1(20.625,14.725) 20.625,14.684 v1@20.639,14.67 ; v1@20.629,14.679 20.629,14.622 v3(20.639,14.613) ; v3(23.775,13.15) 23.794,13.131 23.928,13.131 v1(23.947,13.112)
  Sig1 w0.075: v3(20.639,14.613) 20.663,14.589 20.802,14.589 20.84,14.55 20.903,14.55 20.978,14.625 21.222,14.625 21.485,14.362 21.605,14.362 21.825,14.143 21.825,13.398 22.137,13.086 22.823,13.086 22.887,13.15 v3(23.775,13.15)
QVAR2: R33.2 U21.9 | length 5.6
  Top Sig/Pwr w0.075: v1(20.2,14.575) 20.2,14.541 20.266,14.476 R33.2@20.266,14.125
  GND1 w0.075: v1(20.2,14.575) v3(20.275,14.65) ; v1(23.325,14.2) 23.337,14.188 23.337,14.012 v3(23.35,14)
  Sig1 w0.075: v3(20.275,14.65) 20.309,14.65 20.435,14.776 20.502,14.776 20.551,14.825 21.235,14.825 21.547,14.513 21.667,14.513 21.975,14.205 21.975,13.46 22.199,13.236 22.758,13.236 22.885,13.364 23.114,13.364 23.35,13.6 v3(23.35,14)
R\S\T\: J2.5 J3.10 R24.2 U5.G2 | length 84.9
  Top Sig/Pwr w0.075: v1(11.826,4.346) 11.826,4.299 U5.G2@11.85,4.275
  Top Sig/Pwr w0.2: v1(8.75,23.75) 9.25,23.75 12.3,26.8 42.367,26.8 49.03,20.137 49.03,12.68 J3.10@47.77,11.42
  GND1 w0.075: v3(11.757,4.429) 11.757,4.415 v1(11.826,4.346)
  GND1 w0.2: v3(8.75,23.5) v1(8.75,23.75)
  Sig2 w0.075: v4(8.725,19.425) 8.725,14.924 8.051,14.25 7.326,14.25 6.45,13.374 6.45,12.762 6.837,12.375 8.212,12.375 9.062,11.525 9.251,11.525 9.479,11.296 9.479,11.079 9.385,10.984 9.231,10.83 9.231,10.519 9.4,10.35 9.4,8.55 9.79,8.16 9.79,7.56 10.257,7.093 10.467,7.093 11.884,5.676 11.884,5.001 11.526,4.642 10.308,4.642 10.218,4.732 9.795,4.732 9.622,4.558 v4(9.597,4.558)
  GND3 w0.075: v2(9.575,4.25) 9.599,4.274 9.599,4.415 9.675,4.491 v6(9.675,4.525)
  Sig1 w0.075: v4(9.597,4.558) 9.658,4.558 9.771,4.671 9.867,4.671 9.93,4.734 11.059,4.734 11.193,4.6 11.525,4.6 11.587,4.537 11.614,4.537 11.723,4.429 v3(11.757,4.429)
  Sig1 w0.2: v4(8.725,19.425) 8.725,20.475 8.75,20.5 v3(8.75,23.5)
  Pwr w0.075: v4(9.597,4.558) 9.631,4.525 v6(9.675,4.525)
  Bot Sig/Pwr w0.075: v2(9.575,4.25) 9.551,4.226 9.551,4.134 9.55,3.299 9.594,3.255 10.012,3.255 J2.5@10.018,3.248 ; J2.5@10.055,3.25 R24.2@10.818,3.25
RESET_N: GAP1.D4 J4.1 R22.1 R42.2 | length 31.6
  GND1 w0.075: v3(17.493,7.69) 17.493,7.659 17.683,7.468 18.052,7.468 18.272,7.248 18.951,7.248 19.128,7.426 v1(19.128,7.44)
  GND1 w0.2: v3(35,7.15) 35,6.925 v1(35.025,6.9)
  GND3 w0.075: v2(25.343,10.155) 25.373,10.155 v6(25.484,10.044) ; v2(26.234,10.42) 26.291,10.363 v6(26.307,10.363)
  Sig1 w0.075: v4(17.231,7.758) 17.292,7.758 17.346,7.703 17.48,7.703 v3(17.493,7.69)
  Sig1 w0.2: v4(34.9,7.4) 34.919,7.381 34.919,7.231 v3(35,7.15)
  Pwr w0.075: v4(17.231,7.758) 17.231,7.226 17.091,7.087 17.091,6.638 17.245,6.484 17.405,6.484 17.901,5.988 17.901,5.762 19.3,4.363 20.094,4.363 20.1,4.356 21.018,4.356 21.192,4.529 21.384,4.529 21.57,4.343 21.932,4.343 22.175,4.1 22.41,4.1 22.854,3.656 23.308,3.656 23.445,3.793 23.786,3.793 23.899,3.68 25.02,3.68 25.281,3.941 25.35,3.941 25.786,4.377 25.786,5.009 ; v6(25.484,10.044) 25.508,10.02 25.508,9.86 25.567,9.801 25.567,8.637 25.63,8.574 25.63,7.893 25.665,7.858 25.665,7.408 25.787,7.286 25.787,5.009 ; v6@25.491,10.051 25.723,10.283 25.94,10.283 25.984,10.238 26.149,10.238 26.274,10.363 v6(26.307,10.363) 26.331,10.339 26.507,10.339 26.557,10.289 26.741,10.289 26.792,10.237 28.805,10.237 28.937,10.106 28.999,10.106 29.012,10.119
  Pwr w0.2: 29.012,10.119 29.056,10.075 29.112,10.075 30.412,8.775 33.56,8.775 34.445,7.889 34.445,7.855 v4(34.9,7.4)
  Bot Sig/Pwr w0.075: v2(26.234,10.42) 26.305,10.491 R22.1@26.305,10.525
SHARED_GPIOs_SEL: U5.E3 U9.6 U9.7 U9.14 U9.15 U10.6 U10.7 U10.14 U10.15 | length 35.6
  Top Sig/Pwr w0.075: v1(10.841,4.878) 10.869,4.878 11.122,4.625 U5.E3@11.15,4.625 ; v1(13.082,14.693) 13.102,14.713 15.202,14.713 15.398,14.516 16.348,14.516 16.542,14.322 17.312,14.322 17.634,14 17.634,13.822 17.769,13.687 17.769,12.896 17.811,12.855 20.741,12.855 21.523,12.073 21.523,11.581 21.832,11.272 22.786,11.272 22.83,11.228 U10.15@22.83,10.855 ; U10.6@22.825,8.45 22.825,8.61 22.887,8.671 22.984,8.671 23.225,8.913 ; U10.15@22.825,10.85 22.825,10.65 23.054,10.421 23.054,10.203 23.225,10.032 ; v1(23.211,8.333) 23.225,8.347 U10.7@23.225,8.45 23.225,8.913 ; U10.14@23.225,10.827 23.225,10.032 ; v1(25.442,8.602) U9.6@25.45,8.602 ; U9.6@25.45,8.45 U9.6@25.45,8.602 ; U9.15@25.45,10.85 25.45,10.65 25.679,10.421 25.679,10.068 25.85,9.897 ; U9.7@25.85,8.5 25.85,9.313 ; U9.14@25.85,10.85 25.85,9.897 ; 23.225,8.913 23.225,9.031 23.156,9.1 23.156,9.531 23.225,9.601 23.225,10.032 ; U9.6@25.45,8.602 25.45,8.65 25.677,8.877 25.677,9.141 25.85,9.313 ; 25.85,9.313 25.85,9.897
  GND1 w0.075: v1(10.841,4.878) 10.855,4.893 10.855,5.043 v3(10.87,5.057) ; v3(13.029,14.523) 13.053,14.547 13.053,14.63 13.082,14.659 v1(13.082,14.693) ; v1(23.211,8.333) 23.226,8.318 23.226,8.193 v3(23.24,8.178) ; v3(25.275,8.475) 25.295,8.475 25.422,8.602 v1(25.442,8.602)
  Sig1 w0.075: v3(10.87,5.057) 11.061,5.249 11.061,6.051 11.028,6.085 11.028,6.808 10.748,7.088 10.748,7.267 10.98,7.5 11.126,7.5 11.696,8.07 11.696,12.311 11.652,12.355 11.603,12.355 11.485,12.474 11.485,12.661 12.206,13.382 12.276,13.382 12.283,13.389 12.419,13.389 12.794,13.764 12.794,14.288 v3(13.029,14.523) ; v3(23.24,8.178) 23.257,8.178 23.603,8.524 24.128,8.524 24.133,8.519 25.025,8.519 25.063,8.481 25.269,8.481 v3(25.275,8.475)
soft_R\S\T\: IC3.A1 U5.J2 | length 17.2
  Top Sig/Pwr w0.075: v1(12.5,1.218) 12.466,1.218 12.336,1.348 12.283,1.348 12.211,1.42 12.211,2.092 13.176,3.058 13.176,3.226 v1(13.2,3.25) ; v1(12.525,4.325) 12.525,4.309 12.55,4.284 U5.J2@12.55,4.275 ; v1(13.575,0.475) 13.812,0.238 20.4,0.238 20.604,0.442 20.604,0.619 20.783,0.797 20.807,0.797 ; 20.806,0.82 20.806,2.243 21.011,2.449 21.093,2.449 21.367,2.723 22.025,2.723 22.303,3 IC3.A1@22.75,3
  GND1 w0.075: v1(12.5,1.218) 12.5,1.184 12.633,1.051 12.633,0.997 12.791,0.84 13.229,0.84 13.575,0.494 v1(13.575,0.475) ; v1(12.525,4.325) 12.525,4.291 12.406,4.172 12.406,3.722 12.466,3.663 12.938,3.663 13.063,3.538 13.063,3.413 13.2,3.276 v1(13.2,3.25)
SPI_A_CLK: R44.2 U5.L12 U12.9 | length 22
  Top Sig/Pwr w0.075: v1(9.26,11.008) 9.468,11.008 R44.2@9.494,11.034 ; R44.2@9.555,11.122 9.999,10.677 10.167,10.677 10.198,10.647 11.719,10.647 v1(12.603,9.763) ; U5.L12@13.25,7.775 13.272,7.797 13.272,7.946 13.338,8.012 v1(13.338,8.046)
  GND1 w0.075: v3(9.226,10.862) 9.243,10.878 9.243,10.992 v1(9.26,11.008) ; v1(12.603,9.763) 12.636,9.763 12.751,9.649 12.878,9.649 v3(12.902,9.625) ; v3(13.089,8.618) 13.104,8.603 13.104,8.387 13.238,8.253 13.238,8.181 13.338,8.08 v1(13.338,8.046)
  GND3 w0.075: v6(8.75,1.775) 8.75,1.741 8.88,1.611 8.88,1.549 8.955,1.474 9.282,1.474 9.495,1.687 10.677,1.687 11.086,2.096 11.713,2.096 11.736,2.119 12.281,2.119 12.285,2.123 v2(12.475,2.125) v2(12.475,2.125)
  Sig1 w0.075: v4(8.91,7.815) 8.867,7.858 8.867,8.034 8.807,8.093 8.807,8.452 8.707,8.552 8.707,8.992 9.214,9.499 9.214,10.849 v3(9.226,10.862) ; v3(12.902,9.625) 13.163,9.364 13.163,9.084 13.222,9.024 13.222,8.754 13.089,8.621 v3(13.089,8.618)
  Pwr w0.075: v6(8.75,1.775) 8.726,1.799 8.726,1.922 8.693,1.955 8.693,2.309 8.612,2.39 8.612,2.944 8.777,3.108 8.777,3.649 9.185,4.056 9.185,4.898 9.96,5.674 9.96,6.417 9.527,6.85 9.527,7.004 9.115,7.416 9.115,7.447 9.108,7.454 9.108,7.614 8.91,7.812 v4(8.91,7.815)
  Bot Sig/Pwr w0.075: v2(12.475,2.125) 12.499,2.149 12.499,2.255 12.51,2.266 12.51,2.343 12.563,2.396 13.071,2.396 U12.9@13.075,2.4
SPI_A_CLK_GAP: GAP1.B2 U12.8 | length 10.3
  GND1 w0.075: v3(16.476,6.012) 17.009,6.547 17.709,6.547 17.743,6.513 17.919,6.513 18.158,6.751 18.223,6.751 18.224,6.749 18.376,6.749 v1(18.4,6.725)
  GND3 w0.075: v2(12.486,4.016) 12.51,4.04 12.51,4.108 12.653,4.25 12.852,4.45 12.905,4.45 13.055,4.6 v6(13.075,4.6)
  Sig1 w0.075: v4(14.818,4.704) 14.835,4.688 15.39,4.688 15.421,4.657 16.193,4.657 16.338,4.511 16.576,4.511 16.797,4.733 16.797,5.104 17.126,5.432 17.126,5.609 16.913,5.822 16.648,5.822 16.476,5.994 v3(16.476,6.012)
  Pwr w0.075: v6(13.075,4.6) 13.084,4.609 13.34,4.609 13.467,4.736 14.786,4.736 v4(14.818,4.704)
  Bot Sig/Pwr w0.075: v2(12.486,4.016) 12.486,3.756 12.875,3.367 U12.8@12.875,3 ; U12.8@12.867,2.789 U12.8@12.867,2.989
SPI_A_CS: J2.28 R30.2 U5.J7 U12.4 | length 22.7
  Top Sig/Pwr w0.075: v1(8.696,10.481) 8.729,10.481 8.767,10.444 9.403,10.444 R30.2@9.435,10.476 ; v1(10.75,6.275) 10.907,6.432 10.907,6.503 11.04,6.636 11.882,6.636 12.079,6.44 12.079,6.103 12.221,5.96 12.454,5.96 12.519,6.025 U5.J7@12.55,6.025
  GND1 w0.075: v3(8.565,10.494) 8.572,10.487 8.689,10.487 v1(8.696,10.481) ; v3(8.946,5.915) 8.951,5.915 9.088,5.778 9.112,5.778 9.254,5.636 9.58,5.636 9.628,5.684 9.634,5.684 9.888,5.938 10.081,5.938 10.106,5.913 10.162,5.913 10.165,5.91 10.315,5.91 10.6,6.196 10.637,6.196 10.716,6.275 v1(10.75,6.275)
  GND3 w0.075: v2(7.604,10.454) 7.617,10.468 8.501,10.468 8.525,10.444 9.024,10.444 v2(9.039,10.429) ; v2(8.257,5.959) 8.272,5.974 8.388,5.974 v6(8.403,5.989) ; v2(10.64,1.295) 10.664,1.319 10.664,1.373 v2(10.914,1.623)
  Sig1 w0.075: v4(8.393,10.544) 8.42,10.518 8.508,10.518 8.518,10.508 8.518,10.494 v3(8.565,10.494) ; v4(8.405,5.837) 8.466,5.837 8.547,5.918 8.943,5.918 v3(8.946,5.915)
  Pwr w0.075: v6(8.403,5.989) 8.403,5.839 v4(8.405,5.837) ; v6(8.51,10.459) 8.51,10.465 v6@8.475,10.5 ; v6@8.475,10.5 8.437,10.5 v4(8.393,10.544) 8.431,10.544 v6@8.475,10.5
  Bot Sig/Pwr w0.075: J2.28@7.345,10.45 7.349,10.454 v2(7.604,10.454) ; v2(9.039,10.429) 9.015,10.405 9.015,10.224 8.707,9.917 8.707,8.862 8.707,8.458 8.765,8.4 8.765,6.822 8.244,6.301 8.244,5.959 8.257,5.946 8.257,5.925 8.379,5.804 8.379,5.702 8.412,5.669 8.412,5.425 8.52,5.317 8.52,4.733 8.493,4.706 8.493,4.151 8.412,4.07 8.412,2.868 8.417,2.864 8.417,1.384 9.022,0.779 10.288,0.779 10.506,0.997 10.506,1.128 10.64,1.262 v2(10.64,1.295) ; v2(10.914,1.623) 10.914,2.228 11.085,2.4 U12.4@11.475,2.4
SPI_A_CS_GAP: GAP1.E4 U12.5 | length 12.6
  GND1 w0.075: v3(19.352,7.281) 19.352,7.296 19.437,7.381 v1(19.437,7.396)
  GND3 w0.075: v6(11.626,2.502) 11.626,2.536 11.681,2.591 v2(11.681,2.87)
  Sig1 w0.075: v4(11.554,2.4) 11.554,2.367 11.796,2.125 12.054,2.125 13.238,3.31 13.238,3.94 13.364,4.065 13.364,4.092 13.653,4.381 14.016,4.381 14.405,3.992 15.172,3.992 15.222,4.042 15.959,4.042 16.09,3.911 16.302,3.911 16.404,3.81 17.236,3.81 18.5,5.074 18.842,5.074 19.196,5.428 19.196,6.795 19.287,6.886 19.287,7.027 19.338,7.079 19.338,7.267 v3(19.352,7.281)
  Pwr w0.075: v4(11.554,2.4) 11.554,2.43 v6(11.626,2.502)
SPI_A_MISO: R35.2 U5.J8 U12.12 | length 31.4
  GND1 w0.075: v3(12.394,6.435) 12.418,6.411 12.478,6.411 12.517,6.371 v1(12.551,6.371)
  GND3 w0.075: v2(8.187,3.37) 8.449,3.632 v6(8.449,4.318) ; v2(8.91,11.485) 8.944,11.485 9.035,11.576 9.203,11.576 v6(9.227,11.6) ; v6(9.925,11.925) 9.959,11.925 10.085,12.051 10.164,12.051 v2(10.187,12.075) ; v2(11.404,0.914) 11.42,0.93 11.978,0.93 12.348,1.3 v2(12.675,1.3) ; v2(12.31,6.914) 12.31,6.88 12.409,6.781 12.409,6.569 12.284,6.444 12.284,6.382 12.441,6.226 12.564,6.226 12.567,6.223 12.696,6.223 v6(12.72,6.199)
  Sig1 w0.075: v3(12.394,6.435) v3@12.412,6.453 ; v4@12.503,6.488 12.467,6.453 v3@12.412,6.453 ; v4(12.567,6.471) 12.549,6.453 v3@12.412,6.453
  Pwr w0.075: v4(8.17,4.139) 8.213,4.182 8.308,4.182 8.443,4.318 v6(8.449,4.318) ; v6(9.227,11.6) 9.6,11.6 v6(9.925,11.925) ; v4(12.567,6.471) 12.567,6.41 12.696,6.281 12.696,6.223 v6(12.72,6.199)
  Bot Sig/Pwr w0.075: R35.2@8.028,13.968 8.543,13.968 9.696,12.815 9.696,12.387 9.713,12.371 9.713,12.056 9.757,12.013 10.187,12.013 10.279,12.013 ; 8.557,8.924 8.557,8.471 8.24,8.154 8.24,7.878 8.6,7.518 8.6,6.869 8.045,6.314 8.045,5.825 8.262,5.607 8.262,5.358 8.37,5.251 8.37,4.795 8.343,4.768 8.343,4.213 8.262,4.132 8.262,3.957 8.187,3.882 v2(8.187,3.37) 8.187,2.881 8.267,2.801 8.267,1.32 8.958,0.629 10.521,0.629 10.806,0.914 v2(11.404,0.914) ; 8.557,8.924 8.557,9.979 8.826,10.248 8.826,10.57 9.118,10.862 9.118,11.276 v2(8.91,11.485) ; v2(10.187,12.075) 10.216,12.075 10.279,12.013 ; v2(12.31,6.914) 11.92,7.304 11.92,8.81 11.927,8.817 11.927,8.886 11.927,9.273 11.775,9.425 11.339,9.425 10.497,10.267 10.497,10.902 10.498,11.467 10.463,11.502 10.463,11.947 10.397,12.013 10.279,12.013 ; v2(12.675,1.3) 12.699,1.276 12.773,1.276 12.849,1.2 U12.12@13.075,1.2
SPI_A_MISO_GAP: GAP1.E3 U12.13 | length 14
  Top Sig/Pwr w0.075: v1(12.489,0.49) 12.489,0.928 12.061,1.356 12.061,2.155 12.844,2.937 12.844,3.144 v1(12.85,3.15) ; v1(19.422,6.997) GAP1.E3@19.525,7.1
  GND1 w0.075: v3@12.488,0.301 v1@12.488,0.489 ; v1(12.85,3.15) v3(12.85,3.3) ; v3(18.931,5.463) 18.953,5.485 18.953,5.801 18.997,5.845 18.997,6.021 18.994,6.025 18.994,6.281 19.355,6.642 19.355,6.823 19.398,6.866 19.398,6.973 v1(19.422,6.997)
  GND3 w0.075: v6(12.837,0.407) 12.837,0.441 12.868,0.471 v2(12.868,0.682)
  Sig1 w0.075: v4(12.45,0.3) v3(12.488,0.3) ; v3(12.85,3.3) 13.088,3.538 13.088,4.002 13.214,4.128 13.214,4.154 13.59,4.531 14.116,4.531 14.259,4.388 14.259,4.35 14.467,4.142 15.11,4.142 15.16,4.192 16.021,4.192 16.152,4.061 16.364,4.061 16.466,3.96 17.174,3.96 18.438,5.224 18.692,5.224 18.921,5.454 v3@18.921,5.456
  Pwr w0.075: v4(12.45,0.3) 12.467,0.316 12.713,0.316 12.803,0.407 v6(12.837,0.407)
  Bot Sig/Pwr w0.075: v2(12.868,0.682) 12.875,0.675 U12.13@12.875,0.6
SPI_A_MOSI: R45.2 U5.J9 U12.1 | length 22.5
  Top Sig/Pwr w0.075: v1(11.1,11) 11.732,11 v1(12.607,10.125) ; U5.J9@12.55,6.725 U5.J9@12.574,6.701 ; v1(12.568,6.694) U5.J9@12.574,6.701 ; U5.J9@12.572,6.725 12.574,6.722 U5.J9@12.574,6.701
  GND1 w0.075: v1(9.463,11.706) 9.463,11.691 9.624,11.529 v3(9.624,11.514) ; v3(10.9,11.101) 10.934,11.101 11.012,11.024 11.076,11.024 v1(11.1,11) ; v1(12.568,6.694) 12.568,6.712 12.678,6.822 v3(12.678,6.84) ; v1(12.607,10.125) 12.607,10.117 12.692,10.032 v3(12.692,10.023)
  GND3 w0.075: v6(9.525,2.103) 9.9,2.103 9.986,2.188 10.372,2.188 10.528,2.032 v2(10.561,2.032)
  Sig1 w0.075: v4(9.073,8.199) 9.364,8.489 9.364,10.016 9.536,10.188 9.814,10.188 10.045,9.957 10.277,9.957 10.419,10.099 10.419,10.259 10.604,10.444 10.604,10.785 v3@10.852,11.033 ; v3(9.624,11.514) 9.642,11.514 9.825,11.332 9.917,11.332 ; 9.917,11.332 9.999,11.332 10.123,11.208 10.123,11.097 10.186,11.034 10.277,11.034 10.282,11.029 10.499,11.029 10.524,11.053 10.852,11.053 v3(10.9,11.101) ; v3(12.678,6.84) 12.654,6.863 12.654,7.033 12.64,7.047 12.64,7.109 12.714,7.183 12.714,7.589 12.868,7.742 12.868,7.96 12.446,8.381 12.446,9.768 12.692,10.014 v3(12.692,10.023)
  Pwr w0.075: v4(9.073,8.199) 9.116,8.156 9.116,7.98 9.258,7.838 9.258,7.67 9.265,7.663 9.265,7.478 9.688,7.055 9.688,6.901 10.11,6.479 10.11,5.607 9.736,5.232 9.566,5.062 9.566,5.041 9.335,4.81 9.335,3.994 8.927,3.587 8.927,3.046 8.762,2.882 8.762,2.482 9.03,2.214 9.301,2.214 9.389,2.126 9.501,2.126 v6(9.525,2.103)
  Bot Sig/Pwr w0.075: v2(10.561,2.032) 10.561,1.674 11.036,1.2 U12.1@11.525,1.2
SPI_A_MOSI_GAP: GAP1.A1 U12.16 | length 13
  Top Sig/Pwr w0.075: v1(11.975,1.125) 11.975,1.159 11.911,1.223 11.911,2.339 12.168,2.597 12.202,2.597 v1(12.501,2.895) ; v1(17.354,5.939) 17.364,5.949 17.65,5.949 17.784,6.082 17.784,6.194 17.968,6.379 18.104,6.379 GAP1.A1@18.125,6.4
  GND1 w0.075: v1(11.975,1.125) 12.197,1.125 12.384,0.938 12.384,0.89 12.475,0.799 v3(12.475,0.765) ; v1(12.501,2.895) 12.513,2.907 12.513,3.113 v3(12.525,3.125) ; v3(17.342,5.489) 17.353,5.499 17.353,5.938 v1(17.354,5.939)
  GND3 w0.075: v2(11.792,0.391) 11.814,0.414 12.002,0.414 12.045,0.457 v6(12.078,0.457)
  Sig1 w0.075: v4(11.975,0.3) 11.992,0.3 12.458,0.765 v3(12.475,0.765) ; v3(12.525,3.125) 12.525,3.383 12.563,3.421 12.563,3.809 12.717,3.963 12.836,3.963 13.064,4.19 13.064,4.216 13.528,4.681 14.179,4.681 14.567,4.292 15.047,4.292 15.098,4.342 16.083,4.342 16.214,4.211 16.427,4.211 16.528,4.11 16.914,4.11 16.96,4.156 16.96,4.822 17.352,5.213 17.352,5.479 v3(17.342,5.489)
  Pwr w0.075: v4(11.975,0.3) 11.975,0.327 12.078,0.43 v6(12.078,0.457)
SPI_B_CLK: J5.2 R46.2 U5.G3 U13.9 | length 14.8
  Top Sig/Pwr w0.075: v1(8.675,13) 8.711,12.964 J5.2@8.838,12.964 ; v1(10.215,12.253) 10.225,12.242 R46.2@10.293,12.242 ; v1(11.582,5.009) 11.582,4.975 11.701,4.857 11.701,4.774 U5.G3@11.85,4.625
  GND1 w0.075: v1@8.676,12.999 v3(8.82,12.998) ; v1(10.215,12.253) 10.217,12.25 10.407,12.25 v3(10.41,12.248) ; v3(10.848,5.372) 10.867,5.372 11.035,5.205 11.386,5.205 v1(11.582,5.009)
  GND3 w0.075: v6(11.776,11.856) 11.786,11.847 11.944,11.847 v2(11.953,11.837)
  Sig1 w0.075: v3(8.82,12.998) 8.82,13.023 9.019,13.222 v4(9.019,13.247) ; v3(10.41,12.248) 10.425,12.263 10.668,12.263 10.683,12.278 10.688,12.278 v4@10.745,12.278 ; v4(10.745,12.335) v4@10.745,12.278 ; v3(10.848,5.372) 10.872,5.396 10.872,5.705 10.911,5.744 10.911,5.989 10.878,6.022 10.878,6.746 10.598,7.026 10.598,7.329 10.918,7.65 11.064,7.65 11.546,8.133 11.546,11.533 10.802,12.278 v4@10.745,12.278
  Pwr w0.075: v4(9.019,13.247) 9.157,13.049 9.201,13.006 9.214,12.993 9.308,12.993 ccw(c10.048,13.825) 9.633,12.792 9.644,12.782 9.74,12.686 10.394,12.686 v4(10.745,12.335) 10.745,12.278 11.355,12.278 v6(11.776,11.856)
  Bot Sig/Pwr w0.075: v2(11.953,11.837) 11.953,11.84 12.098,11.984 U13.9@12.51,11.984